# Altium PCB tinyusbboard.PcbDoc
Units mil, origin at the board's own origin, x right, y up, seen from the top; angles counter-clockwise.
Board outline 968.5 x 1968.5 mil, 2 copper layers (Top, Bottom), stack 61.811 mil thick; 33 components, 36 nets, 117 pads, 0 vias.
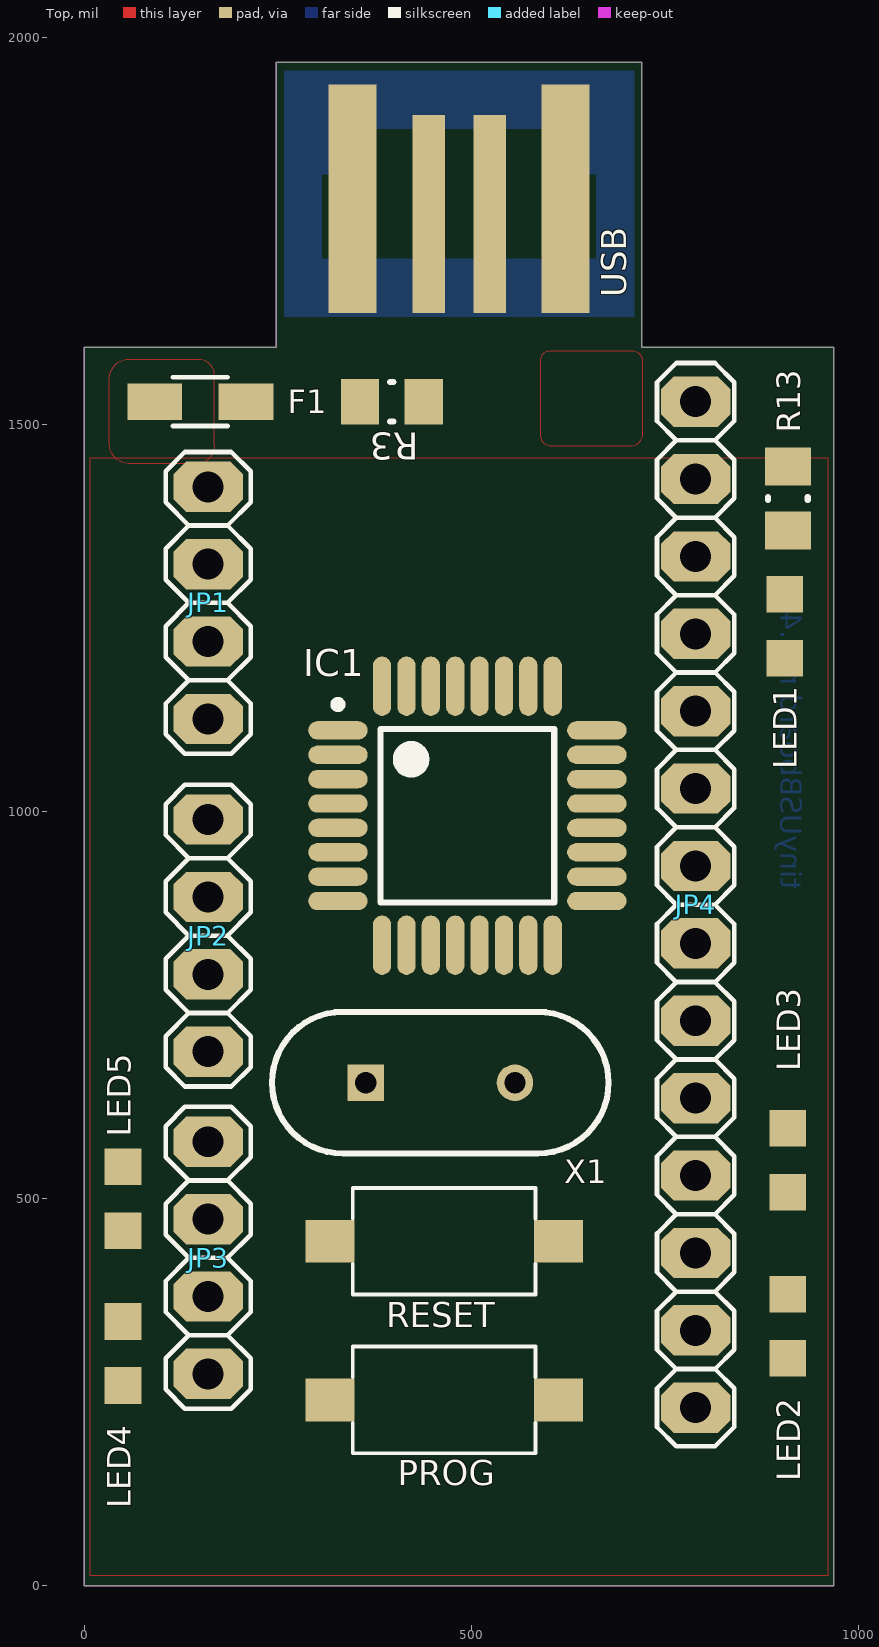
[diagram p0: Top view]
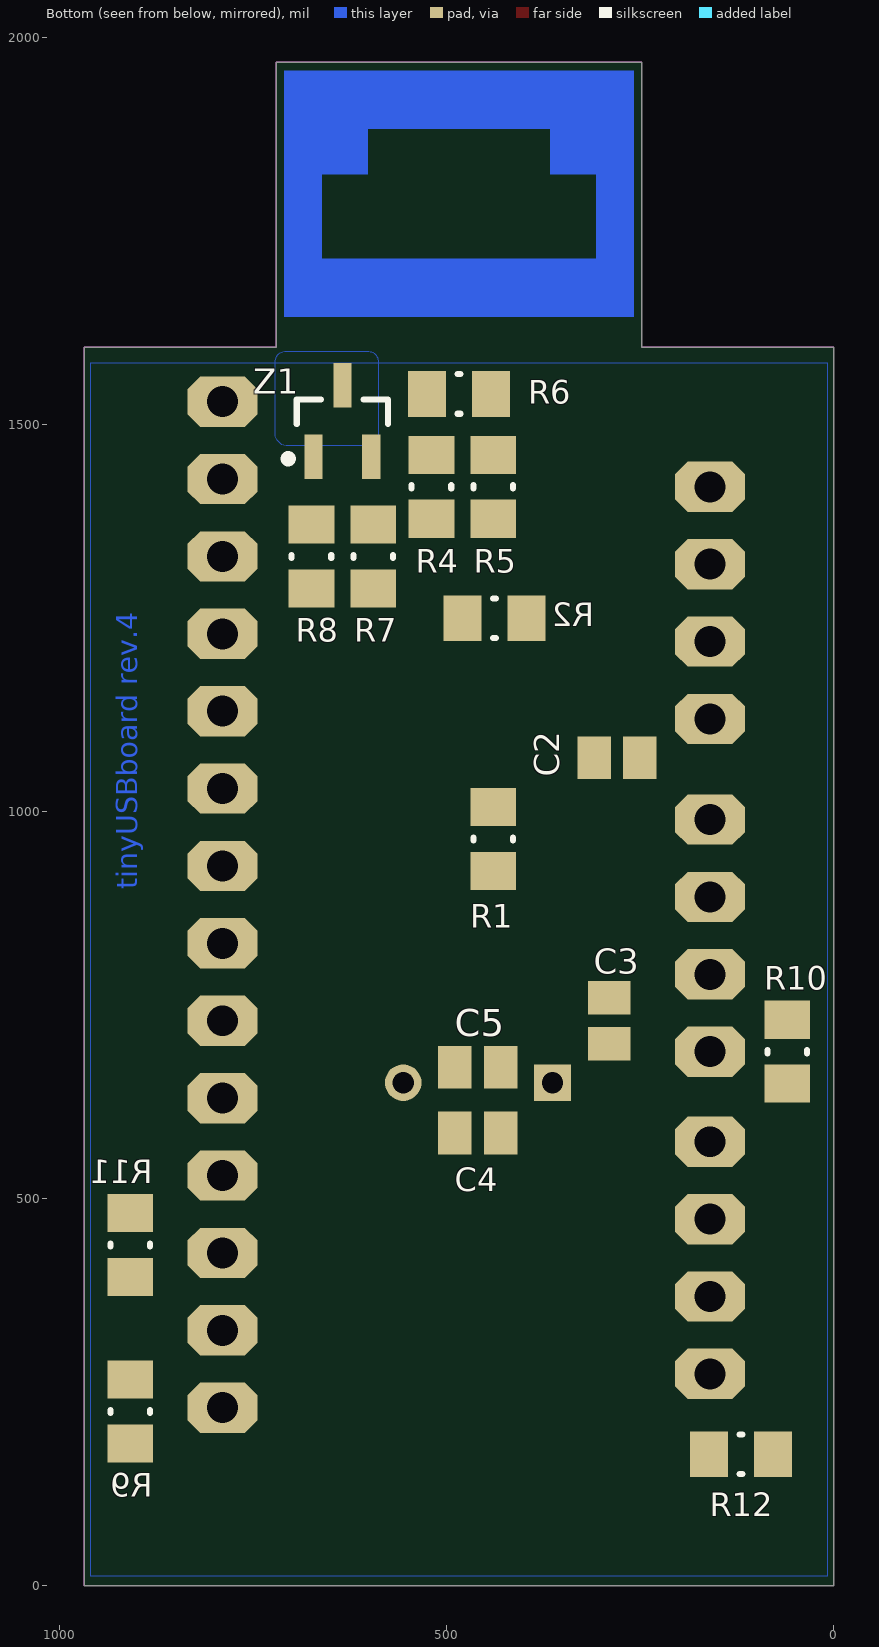
[diagram p1: Bottom view, seen from below]

## Layer stack, top to bottom
Top Solder: solder mask 0.4, Solder Resist, Dk 3.5
Top: signal copper 1.3779
Dielectric 1: core 59.0551, FR-4, Dk 4.8
Bottom: signal copper 1.3779
Bottom Solder: solder mask 0.4, Solder Resist, Dk 3.5

## Board outline
0,0 968.5,0 968.5,1600 720.47,1600 720.47,1968.5 248.03,1968.5 248.03,1600 0,1600

## Design rules (kind name [scope] priority, off if disabled: settings)
BoardOutlineClearance [All] p1: gap=10 ignorepadtopadclearanceinfootprint=FALSE
Clearance [All] p1: gap=7 ignorepadtopadclearanceinfootprint=FALSE
Clearance "Clearance (Same Net)" [All] p2: gap=7 ignorepadtopadclearanceinfootprint=FALSE
HoleSize HoleSize_1 [All] p1: absolutevalues=TRUE maxlimit=100000 minlimit=17 maxpercent=80.000 minpercent=20.000
HoleSize [All] p2: absolutevalues=TRUE maxlimit=100 minlimit=1 maxpercent=80.000 minpercent=20.000
HoleToHoleClearance mdViaViaSameLayer [All] p1: gap=8 allowstackedmicrovias=TRUE
HoleToHoleClearance [All] p2: gap=10 allowstackedmicrovias=TRUE
MinimumSolderMaskSliver [All] p1: minsoldermaskwidth=6
PasteMaskExpansion mlMinCreamFrame [All] p1: expansion=0
PasteMaskExpansion [All] p2: expansion=0
PlaneClearance [All] p1: clearance=2
PolygonConnect PolygonConnect_1 [IsPoly vs InComponent('F1') OR InComponent('C4')] p1: connectstyle=Direct reliefconductorwidth=10 reliefentries=4 polygonreliefangle="90 Angle" airgapwidth=10
PolygonConnect ThermalVias [IsVia] p2: connectstyle=Direct reliefconductorwidth=10 reliefentries=4 polygonreliefangle="90 Angle" airgapwidth=10
PolygonConnect [All] p3: connectstyle=Relief reliefconductorwidth=10 reliefentries=4 polygonreliefangle="90 Angle" airgapwidth=10
RoutingVias [All] p1: holewidth=20 width=30 viastyle="Through Hole" minholewidth=17 minwidth=30 maxholewidth=30 maxwidth=50
SilkToSilkClearance [All] p1 off: silktosilkclearance=10
SilkToSolderMaskClearance [IsPad] p1 off: minsilkscreentomaskgap=10 clearancetoexposedcopper=TRUE
SolderMaskExpansion mlMinStopFrame [All] p1: expansion=4
SolderMaskExpansion [All] p2: expansion=4
Width Width_1 [All] p1: maxlimit=100000 minlimit=6 preferedwidth=10
Width [All] p2: maxlimit=10 minlimit=6 preferedwidth=10
23 further rules are at their usual default settings.

## Classes and differential pairs
net class Z1_Nets: D+ D- GND
net class LED4_Nets: GND NetLED4_A
net class X1_Nets: XTAL1 XTAL2
net class USB_Nets: D+ D- GND RESET
net class RESET_Nets: GND RESET
net class R13_Nets: GND NetLED1_C
net class R12_Nets: NetLED4_A PD5
net class R11_Nets: NetLED3_A PD3
net class R10_Nets: NetLED5_A PB0
net class R9_Nets: NetLED2_A PB1
net class R8_Nets: D- PD2
net class R7_Nets: D+ PD7
net class R6_Nets: NetR4_1 VCC
net class R5_Nets: D- NetR4_1
net class R4_Nets: D+ NetR4_1
net class R3_Nets: RESET VCC
net class R2_Nets: NetJP3_3 PD7
net class R1_Nets: NetJP1_4 PD2
net class PROG_Nets: GND PD6
net class LED5_Nets: GND NetLED5_A
net class LED3_Nets: GND NetLED3_A
net class LED2_Nets: GND NetLED2_A
net class LED1_Nets: NetLED1_C VCC
net class JP4_Nets: AREF GND PB1 PB2 PB3 PB4 PB5 PC0 PC1 PC2 PC3 PC4 PC5 VCC
net class JP3_Nets: NetJP3_3 PB0 PD5 PD6
net class JP2_Nets: GND PD3 PD4 VCC
net class JP1_Nets: NetJP1_4 PD0 PD1 RESET
net class IC1_Nets: AREF GND NetIC1_18 NetIC1_19 NetIC1_22 NetIC1_33 PB0 PB1 PB2 PB3 PB4 PB5 PC0 PC1 PC2 PC3 PC4 PC5 PD0 PD1 PD2 PD3 PD4 PD5 PD6 PD7 RESET VCC XTAL1 XTAL2
net class F1_Nets: RESET VCC
net class C5_Nets: GND XTAL2
net class C4_Nets: GND XTAL1
net class C3_Nets: GND VCC
net class C2_Nets: GND VCC
net class C1_Nets: GND VCC

## Components (designator, comment, footprint, x,y, rotation, side; value= is the part's Value field where it differs from the comment)
C2 "1uF" C0805 280,1070 r0 bottom
C3 "1uF" C0805 290,730 r270 bottom
C4 "18pF" C0805 460,585 r0 bottom
C5 "18pF" C0805 460,670 r180 bottom
F1 "0" R1206W 150,1530 r0 top
IC1 "ATmega8-16AUR" 32A_M 495,995 r0 top
JP1 "PINHD-1X4" "4P Jumper" 160,1120 r180 top
JP2 "PINHD-1X4" "4P Jumper" 160,990 r0 top
JP3 "PINHD-1X4" "4P Jumper" 160,273.66 r180 top
JP4 "PINHD-1X14" "124P Jumper" 790,1530 r0 top
LED1 "green" CHIPLED_0805 905,1240 r0 top
LED2 "red" CHIPLED_0805 909.25,335 r0 top
LED3 "red" CHIPLED_0805 909.25,550 r0 top
LED4 "red" CHIPLED_0805 50,300 r0 top
LED5 "red" CHIPLED_0805 50,500 r0 top
PROG "KSS-2EG4430" KSS-2EG4430 465,240 r0 top
R1 "0R" RESC0805(2012)_M 440,965 r90 bottom
R2 "0R" RESC0805(2012)_M 438.66,1250 r180 bottom
R3 "10k" RESC0805(2012)_M 397.32,1530 r0 top
R4 "1k" RESC0805(2012)_M 520,1420 r90 bottom
R5 "1k" RESC0805(2012)_M 440,1420 r270 bottom
R6 "1k" RESC0805(2012)_M 484.38,1540 r180 bottom
R7 "68" RESC0805(2012)_M 595,1330 r90 bottom
R8 "68" RESC0805(2012)_M 675,1330 r90 bottom
R9 "1k" RESC0805(2012)_M 909.25,225 r90 bottom
R10 "1k" RESC0805(2012)_M 60,690 r270 bottom
R11 "1k" RESC0805(2012)_M 909.25,440 r90 bottom
R12 "1k" RESC0805(2012)_M 120,170 r180 bottom
R13 "2.2k" RESC0805(2012)_M 909.25,1405 r90 top
RESET "KSS-2EG4430" KSS-2EG4430 465,445 r0 top
USB "USBPCB" USB-A-PCB 484.25,1784.25 r270 top
X1 "16MHz" JPY-HC-49US 460,650 r0 top
Z1 "AZ23C3V6" SOT23_M 635,1505 r90 bottom

## Footprints (in the part's own frame and the unit in brackets; to place one, negate y for a bottom-side part, rotate by r counter-clockwise, add the part's x,y. Pads: shape width x height; smd on the part's side, far side on the other; paste and mask are expansions set on the pad)
"4P Jumper" [mil]
  oct 90x65 hole 40: 1(0,0) 2(0,-100) 3(0,-200) 4(0,-300)
  silkscreen extent -55,-345 55,45
32A_M [mm] "Thin QFP, 32-Leads, Body 7x7mm, Pitch 0.8mm, IPC Low Density"
  oval 1.95x0.6 smd: 1(-4.25,2.8) 2(-4.25,2) 3(-4.25,1.2) 4(-4.25,0.4) 5(-4.25,-0.4) 6(-4.25,-1.2) 7(-4.25,-2) 8(-4.25,-2.8) 17(4.25,-2.8) 18(4.25,-2) 19(4.25,-1.2) 20(4.25,-0.4) 21(4.25,0.4) 22(4.25,1.2) 23(4.25,2) 24(4.25,2.8)
  oval 0.6x1.95 smd: 9(-2.8,-4.25) 10(-2,-4.25) 11(-1.2,-4.25) 12(-0.4,-4.25) 13(0.4,-4.25) 14(1.2,-4.25) 15(2,-4.25) 16(2.8,-4.25) 25(2.8,4.25) 26(2,4.25) 27(1.2,4.25) 28(0.4,4.25) 29(-0.4,4.25) 30(-1.2,4.25) 31(-2,4.25) 32(-2.8,4.25)
  silkscreen extent -4.37,-2.85 2.85,3.77, body extent -3.5,-3.5 3.5,3.5, height 1.2
"124P Jumper" [mil]
  oct 90x65 hole 40: 1(0,0) 2(0,-100) 3(0,-200) 4(0,-300) 5(0,-400) 6(0,-500) 7(0,-600) 8(0,-700) 9(0,-800) 10(0,-900) 11(0,-1000) 12(0,-1100) 13(0,-1200) 14(0,-1300)
  silkscreen extent -50,-1350 50,50
C0805 [mm] "Chip Capacitor, Body 2.0x1.3mm, IPC High Density"
  rect 1.1x1.4 smd: 1(-0.75,0) 2(0.75,0)
  body extent -1.1,-0.72 1.1,0.72, height 1.4
CHIPLED_0805 [mil] "CHIPLED_0805"
  rect 47.24x47.24 smd: A(0,-41.34) C(0,41.34)
JPY-HC-49US [mm] "THD, 2-Leads, Body 11.05x4.65mm, Pitch 4.9mm"
  rect 1.2x1.2 hole 0.7: 1(-2.45,0)
  round 1.2 hole 0.7: 2(2.45,0)
  silkscreen extent -5.53,-2.32 5.53,2.32, body extent -5.53,-2.33 5.52,2.32, height 3.5
KSS-2EG4430 [mil] "KSS-2EG4430"
  rect 62.99x55.12 smd: 1(-147.64,0) 2(147.64,0)
  silkscreen extent -118,-69 118,69
R1206W [mil] "R1206W"
  rect 70.87x47.24 smd mask+4: 1(59.02,0)
  rect 70.87x47.24 smd: 2(-59.02,0)
  silkscreen extent -36,-32 35,32
RESC0805(2012)_M [mm] "Chip Resistor, Body 2.0x1.3mm, IPC Low Density"
  rect 1.25x1.5 smd: 1(-1.05,0) 2(1.05,0)
  silkscreen extent -0.05,-0.65 0.05,0.65, body extent -1.1,-0.67 1.1,0.67, height 0.7
SOT23_M [mm] "SOT23, 3-Leads, Body 2.9x1.3mm, Pitch 0.95mm, Lead Span 2.3mm - Reverse Pinning, IPC Low Density"
  rect 1.45x0.6 smd: 1(-1.175,0.946) 2(-1.175,-0.95) 3(1.175,0)
  silkscreen extent -1.36,-1.5 0.7,1.9, body extent -1.34,-1.5 1.07,1.5, height 1.1
USB-A-PCB [mil] "USB-A-PCB"
  rect 295.28x62 smd: 5V(-7.87,-137.8) GND(-7.87,137.8)
  rect 255.91x42 smd: USB_M(11.81,-39.37) USB_P(11.81,39.37)

## Part data
C2 C3 C4 C5: library part C-EUC0805K, "CAPACITOR, European symbol"
F1: library part R-EU_R1206W, "RESISTOR, European symbol"
IC1: library part CMP-0095-00566-1, "8-bit AVR Microcontroller, 4.5-5.5V, 16MHz, 8KB Flash, 512 Bytes EEPROM, 1KB SRAM, 32-pin TQFP, Industrial Grade (-40°C to 85°C), Reel", Code_JEDEC=MS-026-ABA, ComponentLink1Description="Manufacturer URL", ComponentLink1URL=http://www.atmel.com/, ComponentLink2Description=ATmega8(L), ComponentLink2URL=http://www.atmel.com/dyn/resources/prod_documents/doc2486.pdf, ComponentLink3Description="ATmega8(L) Summary", ComponentLink3URL=http://www.atmel.com/dyn/resources/prod_documents/2486S.pdf, DatasheetVersion="revZ, Feb-2011", PackageDescription="32-Lead, 7x7x1.0 mm Body, 0.8mm Lead Pitch, Thin Profile Plastic Quad Flat Package (TQFP)", PackageReference=32A, PackageVersion="revC, Oct-2010"
JP1 JP2 JP3 JP4: "PIN HEADER"
LED1 LED2 LED3 LED4 LED5: library part LEDCHIPLED_0805, "LED   OSRAM: - CHIPLED LG R971, LG N971, LY N971, LG Q971, LY Q971, LO R971, LY R971 LH N974, LH R974 LS Q976, LO Q976, LY Q976 LO Q996 - Hyper CHIPLED LW Q18S LB Q993, LB Q99A, LB R99A - SideLED LS A670, LO A670, LY A670, LG A670, LP A670 LB A673, LV A673, LT A673, LW A673 LH A674 LY A675 LS A676, LA A676, LO A676, LY A676, LW A676 LS A679, LY A679, LG A679 -  Hyper Micro SIDELED® LS Y876, LA Y876, LO Y876, LY Y876 LT Y87S - SmartLED LW L88C, LW L88S LB L89C, LB L89S, LG L890 LS L89K, LO L89K, LY L89K LS L896, LA L896, LO L896, LY L896 - TOPLED LS T670, LO T670, LY T670, LG T670, LP T670 LSG T670, LSP T670, LSY T670, LOP T670, LYG T670 LG T671, LOG T671, LSG T671 LB T673, LV T673, LT T673, LW T673 LH T674 LS T676, LA T676, LO T676, LY T676, LB T676, LH T676, LSB T676, LW T676 LB T67C, LV T67C, LT T67C, LS T67K, LO T67K, LY T67K, LW E67C LS E67B, LA E67B, LO E67B, LY E67B, LB E67C, LV E67C, LT E67C LW T67C LS T679, LY T679, LG T679 LS T770, LO T770, LY T770, LG T770, LP T770 LB T773, LV T773, LT T773, LW T773 LH T774 LS E675, LA E675, LY E675, LS T675 LS T776, LA T776, LO T776, LY T776, LB T776 LHGB T686 LT T68C, LB T68C - Hyper Mini TOPLED® LB M676 - Mini TOPLED Santana® LG M470 LS M47K, LO M47K, LY M47K    Source: http://www.osram.convergy.de   LUXEON: - LUMILED® LXK2-PW12-R00, LXK2-PW12-S00, LXK2-PW14-U00, LXK2-PW14-V00 LXK2-PM12-R00, LXK2-PM12-S00, LXK2-PM14-U00 LXK2-PE12-Q00, LXK2-PE12-R00, LXK2-PE12-S00, LXK2-PE14-T00, LXK2-PE14-U00 LXK2-PB12-K00, LXK2-PB12-L00, LXK2-PB12-M00, LXK2-PB14-N00, LXK2-PB14-P00, LXK2-PB14-Q00 LXK2-PR12-L00, LXK2-PR12-M00, LXK2-PR14-Q00, LXK2-PR14-R00 LXK2-PD12-Q00, LXK2-PD12-R00, LXK2-PD12-S00 LXK2-PH12-R00, LXK2-PH12-S00 LXK2-PL12-P00, LXK2-PL12-Q00, LXK2-PL12-R00    Source: www.luxeon.com   KINGBRIGHT:   KA-3528ASYC Source: www.kingbright.com"
PROG RESET: "Size: 3x6mm  Height: 5mm from PCB  Rating: DC12v 50mA  Travel: 0.25±0.10mm  Operating Force: 180±50gf  Return Force: 60gf min  Contact resistance: 100m? max  Insulation resistance: 100M? min  Operating life?50,000 cycles"
R1 R2 R3 R4 R5 R6 R7 R8 R9 R10 R11 R12 R13: library part R-EU_R0805W, "RESISTOR, European symbol"
USB: "USB Connectors   USB-B-PTH is fully proven SKU : PRT-00139    USB-miniB is fully proven SKU : PRT-00587    USB-A-PCB is untested.    USB-A-H is throughly reviewed, but untested. Spark Fun Electronics SKU : PRT-00437    USB-B-SMT is throughly reviewed, but untested. Needs silkscreen touching up.    USB-A-S has not been used/tested    USB-MB-H has not been used/tested", USB=USB
X1: library part CMP-2100-03645-1, "Crystal, 16 MHz, +/- 30 ppm, 18 pF, -20 to 70 degC, 2-Pin THD", Manufacturer="Jing peng yuan", Package Description="2-Pin Throug Hole Device, Body 11.05 x 4.65 mm, Pitch 4.9 mm", Package Reference=HC-49US, Datasheet URL=https://statics3.seeedstudio.com/images/opl/datasheet/306010014.pdf, Datasheet Version=42125.0
Z1: library part DUAL_ZENER, "3.6V Zener Diode, Dual Common Anode", Manufacturer="Vishay Semi", Package=SOT-23, MPN=AZ23C3V6

## Nets (pads, with @x,y where several pads share a name; then routed paths per layer and width w, separated by ;. In a path a pad name is that pad's centre, name@x,y a point inside that pad or via, vN(x,y) a via of type N, cw(c..) or ccw(c..) an arc to the next point about the centre after c; other vN are vias at no path point)
AREF: IC1.20 JP4.8
D+: R4.2 R7.2 USB.USB_M Z1.2
D-: R5.2 R8.2 USB.USB_P Z1.1
GND: C2.2 C3.2 C4.2 C5.2 IC1.3 IC1.5 IC1.21 JP2.4 JP4.7 LED2.C LED3.C LED4.C LED5.C PROG.1 R13.2 RESET.1 USB.GND Z1.3
NetJP1_4: JP1.4 R1.2
NetJP3_3: JP3.3 R2.2
NetLED1_C: LED1.C R13.1
NetLED2_A: LED2.A R9.2
NetLED3_A: LED3.A R11.2
NetLED4_A: LED4.A R12.2
NetLED5_A: LED5.A R10.2
NetR4_1: R4.1 R5.1 R6.1
PB0: IC1.12 JP3.4 R10.1
PB1: IC1.13 JP4.14 R9.1
PB2: IC1.14 JP4.13
PB3: IC1.15 JP4.12
PB4: IC1.16 JP4.11
PB5: IC1.17 JP4.10
PC0: IC1.23 JP4.6
PC1: IC1.24 JP4.5
PC2: IC1.25 JP4.4
PC3: IC1.26 JP4.3
PC4: IC1.27 JP4.2
PC5: IC1.28 JP4.1
PD0: IC1.30 JP1.2
PD1: IC1.31 JP1.3
PD2: IC1.32 R1.1 R8.1
PD3: IC1.1 JP2.1 R11.1
PD4: IC1.2 JP2.2
PD5: IC1.9 JP3.1 R12.1
PD6: IC1.10 JP3.2 PROG.2
PD7: IC1.11 R2.1 R7.1
RESET: F1.1 IC1.29 JP1.1 R3.1 RESET.2 USB.5V
VCC: C2.1 C3.1 F1.2 IC1.4 IC1.6 JP2.3 JP4.9 LED1.A R3.2 R6.2
XTAL1: C4.1 IC1.7 X1.1
XTAL2: C5.1 IC1.8 X1.2
pads on no net: IC1.18 IC1.19 IC1.22

## Polygon pours and split planes (outlines as drawn)
GND on Bottom "Bottom-GND" (solid, remove dead copper, shelved, pour order 0): 7.87,1579.53 960.63,1579.53 960.63,12.6 7.87,12.6
GND on Bottom "NONET_L02_P008" (solid, remove dead copper, shelved, pour order 8): 589,1487.65 ccw(c603.75,1487.65) 603.75,1472.9 707.75,1472.9 ccw(c705.75,1488.9) 721.75,1490.9 721.75,1582.9 ccw(c708.75,1581.9) 707.75,1594.9 601,1594.9 ccw(c601,1582.9) 589,1582.9
VCC on Top "Top-VCC" (solid, remove dead copper, shelved, pour order 2): 7.87,1457.48 960.63,1457.48 960.63,12.6 7.87,12.6
GND on Top "Top-GND2" (solid, remove dead copper, shelved, pour order 4): 589,1487.65 ccw(c603.75,1487.65) 603.75,1472.9 707.75,1472.9 ccw(c705.75,1488.9) 721.75,1490.9 721.75,1582.9 ccw(c708.75,1581.9) 707.75,1594.9 601,1594.9 ccw(c601,1582.9) 589,1582.9
VCC on Top "Top-VCC2" (solid, remove dead copper, shelved, pour order 6): 167.5,1565 167.5,1475 cw(c145,1472.5) 147.5,1450 57.5,1450 cw(c57.5,1475) 32.5,1475 32.5,1560 cw(c57.5,1560) 57.5,1585 147.5,1585 cw(c147.5,1565)

## Keep-outs
Keep-Out Layer:
  the board outline again, w1

## Other copper
Bottom:
  region: 258.43,1705 258.43,1902.36 307.08,1902.36 307.08,1705
  region: 661.42,1705 661.42,1902.36 710.34,1902.36 710.34,1705
  region: 258.43,1882.68 258.43,1957.48 710.34,1957.48 710.34,1882.68
  region: 287.4,1823.62 287.4,1894.49 366.14,1894.49 366.14,1823.62
  region: 602.36,1823.62 602.36,1894.49 681.1,1894.49 681.1,1823.62
  region: 258.43,1639.61 258.43,1714.41 710.34,1714.41 710.34,1639.61
  text "tinyUSBboard rev.4" at 900,900 h27 r270

## Silkscreen, mask and mechanical layers (free items; w line width, h text height)
Bottom Solder:
  region: 257.87,1705.51 257.87,1953.54 304.25,1953.54 304.25,1705.51
  region: 663.38,1705.51 663.38,1953.54 710.63,1953.54 710.63,1705.51
  region: 287.4,1827.56 287.4,1894.49 362.2,1894.49 362.2,1827.56
  region: 606.3,1827.56 606.3,1894.49 681.1,1894.49 681.1,1827.56
Dimension:
  the board outline again, w5
Assembly Top:
  region: 285.27,1132.52 285.27,1325.43 663.23,1325.43 663.23,1132.52
Assembly Bottom:
  region: 255.98,22.28 255.98,329.37 692.52,329.37 692.52,22.28
  text "2x 68R" at 459.37,1254.57 h48.83 r270
  text "B2" at 340.31,1018.19 h48.83 r270
  text "2x .1uF" at 461.85,805.75 h48.83 r270
  text "B1" at 533.78,661.02 h48.83 r270
  text "18pF" at 362.64,571.73 h48.83 r270
  text "10k" at 191.49,512.2 h48.83 r270
  text "18pF" at 677.64,479.96 h48.83 r270
  text "empty" at 489.13,420.43 h48.83
Drill Drawing:
  the board outline again, w2
LOGOS:
  drawing of 302 lines, arcs and shapes, not listed
top_labels:
  text "matrixstorm.com" at 265.9,1590 h30.12
  text "FUSE" at 117.08,1437.36 h49.6
  text "CAP" at 731.53,1437.36 h49.6
  text "RST" at 2.99,1362.95 h61.02
  text "A5" at 709.88,1345.59 h61.02 r90
  text "PC5" at 875.04,1345.59 h48.83 r90
  text "PD0" at 2.99,1261.26 h61.02
  text "A4" at 709.88,1246.38 h61.02 r90
  text "PC4" at 875.04,1241.42 h48.83 r90
  text "PD1" at 2.99,1162.05 h61.02
  text "A3" at 709.88,1147.17 h61.02 r90
  text "PC3" at 875.04,1137.24 h48.83 r90
  text "PD2" at 2.99,1062.83 h61.02
  text "A2" at 709.88,1047.95 h61.02 r90
  text "PC2" at 875.04,1033.07 h48.83 r90
  text "PC1" at 842.36,963.62 h61.02
  text "PD3" at 2.99,961.14 h61.02
  text "A1" at 709.88,953.7 h61.02 r90
  text "Stephan" at 407.28,874.64 h20.4
  text "PC0" at 842.36,866.89 h61.02
  text "PD4" at 2.99,861.93 h61.02
  text "BÃ¤rwolf," at 407.28,854.24 h20.4
  text "A0" at 712.36,854.49 h61.02 r90
  text "Sharath" at 407.28,833.84 h20.4
  text "Chandra," at 407.28,813.44 h20.4
  text "Martin" at 407.28,793.04 h20.4
  text "Fischer" at 407.28,772.64 h20.4
  text "GND" at 836.45,765.2 h61.02
  text "Vcc" at 2.99,762.72 h61.02
  text "REF" at 842.36,663.5 h61.02
  text "GND" at 2.99,661.02 h61.02
  text "Vcc" at 842.36,564.29 h61.02
  text "PB5" at 875.04,442.76 h48.83 r90
  text "RESET" at 263.42,378.27 h62
  text "PROG" at 521.38,378.27 h62
  text "PD5" at 107.16,343.54 h48.83 r90
  text "PB4" at 875.04,338.58 h48.83 r90
  text "PD6" at 107.16,239.37 h48.83 r90
  text "PB3" at 875.04,236.89 h48.83 r90
  text "PB2" at 875.04,140.16 h48.83 r90
  text "PD7" at 107.16,137.68 h48.83 r90
  text "Ilmenau" at 352.16,88.07 h20.4 r90
  text "18.10.2014" at 372.56,88.07 h20.4 r90
  text "PB1" at 842.36,63.27 h61.02
  text "PB0" at 2.99,60.79 h61.02